# EAGLE board UNOWiFiREV2V4.0 (EAGLE 9.4.2), part 1 of 2
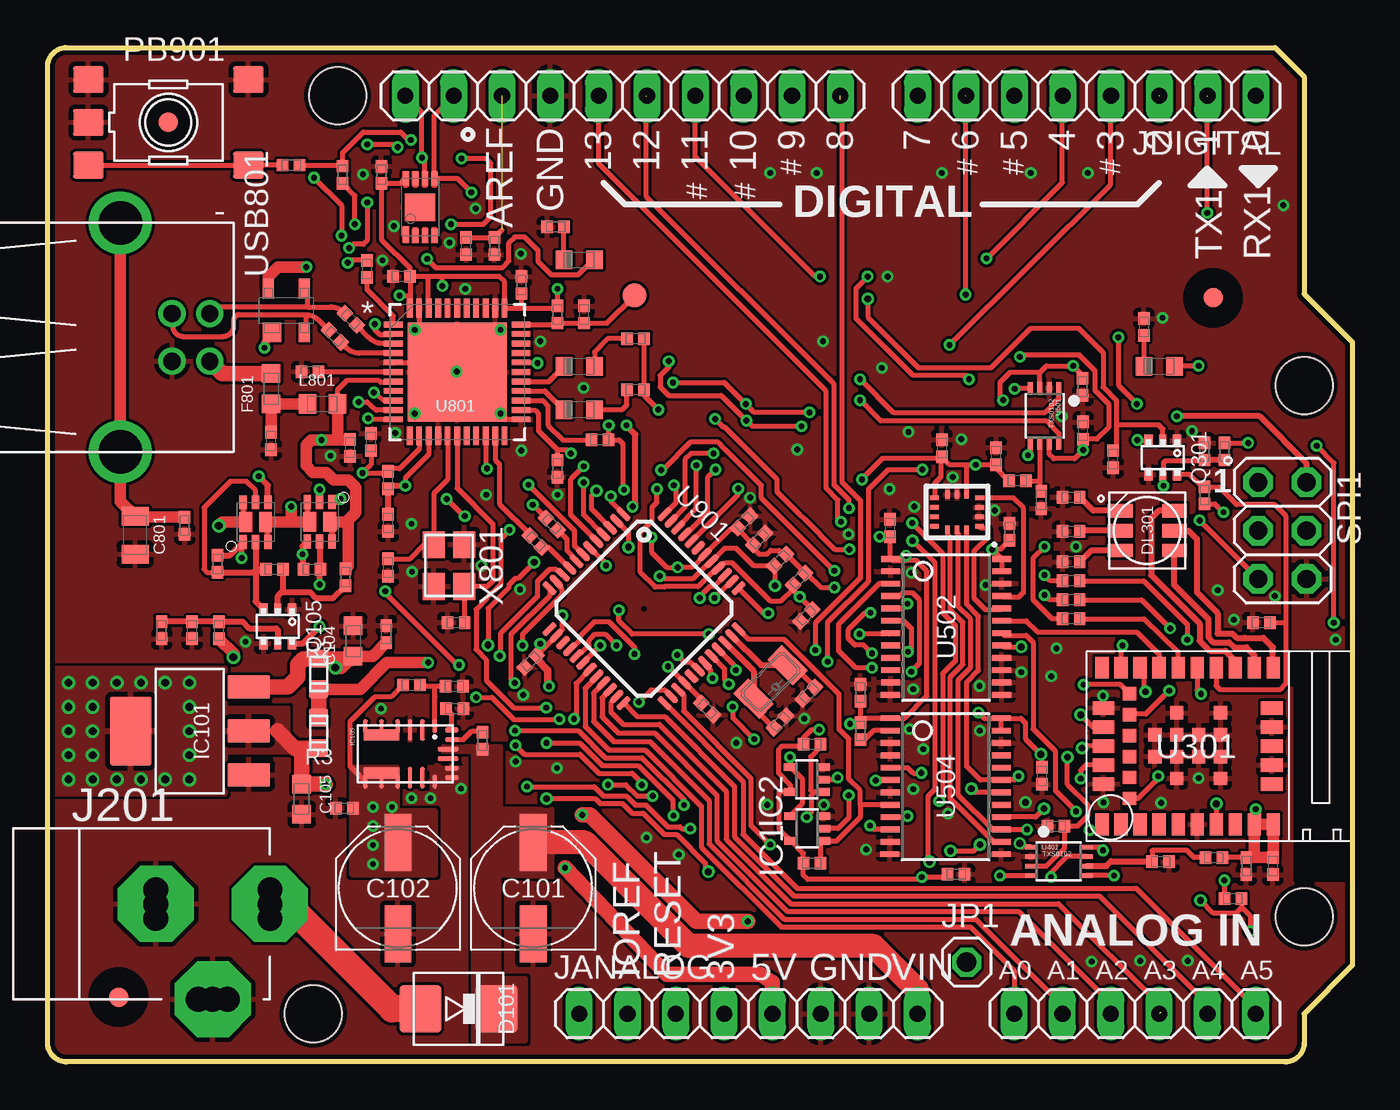
[diagram p0: board, top side]
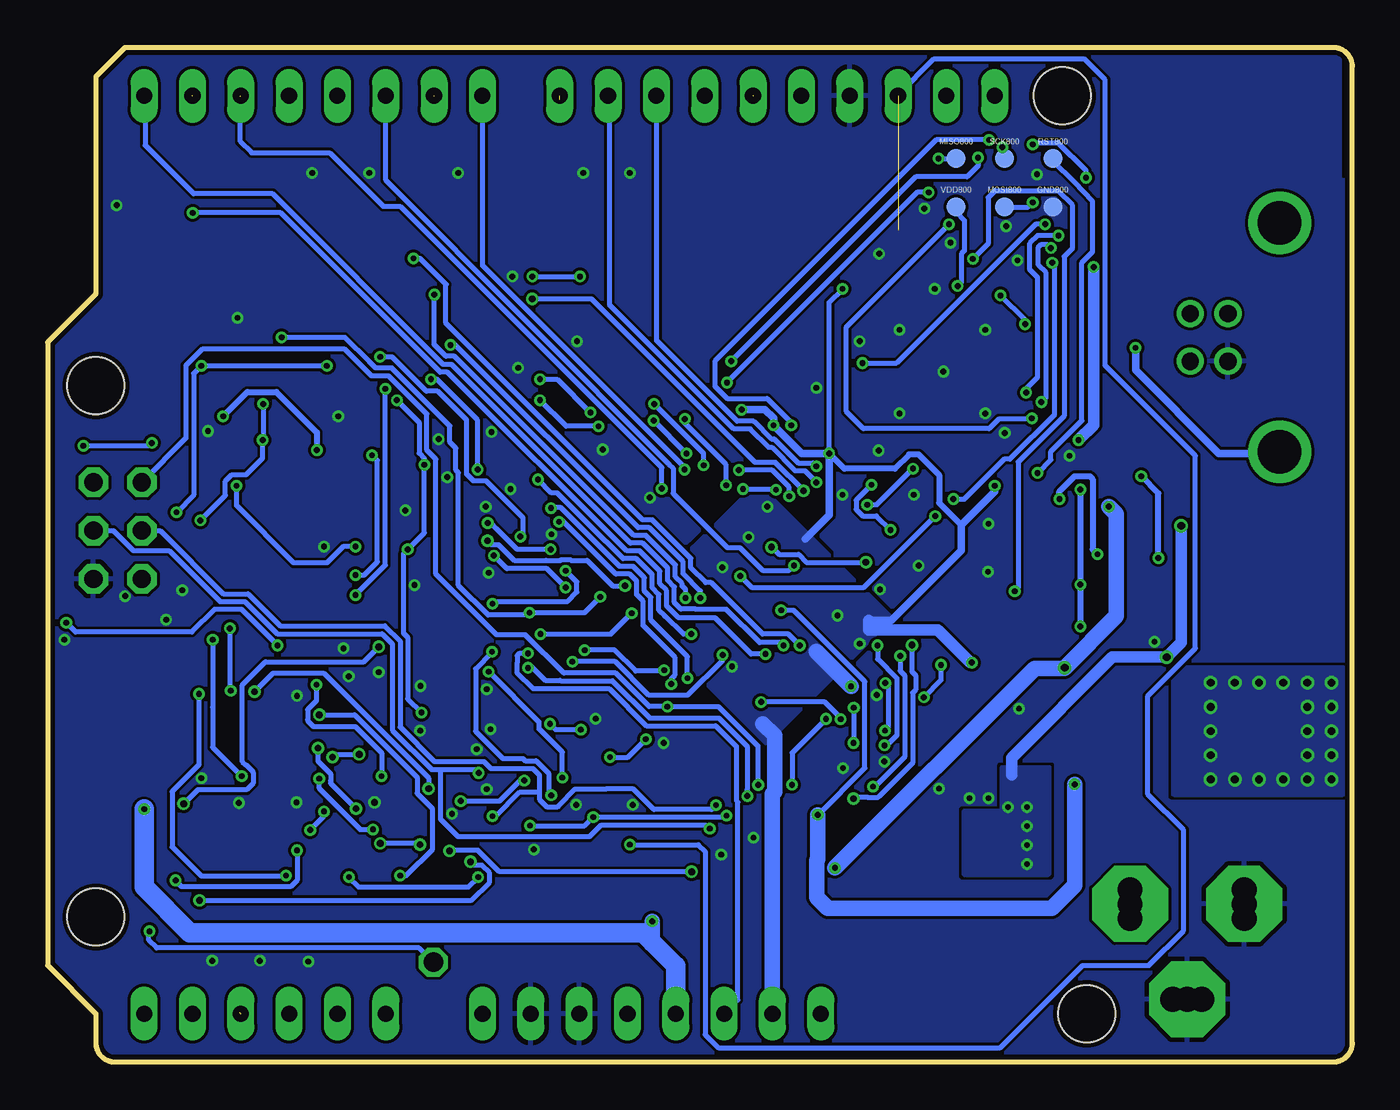
[diagram p1: board, bottom side, seen from below]

Size 68.58 x 53.34 mm. Coordinates in mm from the lower left corner, seen from the top.
Outline: 64.52,53.34 66.04,51.82 66.04,40.39 68.58,37.85 68.58,5.08 66.04,2.54 66.04,1 arc-90 65.04,0 1,0 arc-90 0,1 0,52.34 arc-90 1,53.34 64.52,53.34
Copper layers (1*16): Top 0.035mm / dielectric 1.5mm / Bottom 0.035mm
Design rules "SeeedStudio_2layers": minimum track width 6mil, minimum drill 12mil, track to track 6mil, track to pad 6mil, pad to pad 6mil, via to via 6mil, smd to smd 0mil, copper to edge 10mil, drill to drill 10mil, minimum pad ring 10mil, minimum via ring 6mil, stop-mask expansion 2mil, vias tented up to drill 100mil, thermal gap 10mil
Net classes: 0 default: width 0.006 mm, drill 0.305 mm
Holes 3 mm at 66.04,35.56 66.04,7.62 15.24,50.8 13.97,2.54
tRestrict: 3 lines

## Footprints (pad centres in the part's own frame; a part is rotated, then mirrored left to right if it is on the bottom)
0402-1005X55N = smd 0.62 x 0.62: 1 -0.45,0; 2 0.45,0
PANASONIC_D = smd 3 x 1.4: + 2.4,0; - -2.4,0
0603-1608X90N = smd 0.95 x 1: 1 -0.8,0; 2 0.8,0
0805-R2013X50N = smd 0.95 x 1.45: 1 -1,0; 2 1,0
SMB_DO214AA = smd 2.2 x 2.5: A -2,0; C 2,0
SOT190P230X110-4N = smd 1 x 1: 1 -1.15,0.75 | smd 1 x 0.6: 2 -1.15,-0.95; 3 1.15,-0.95; 4 1.15,0.95
RGBLED = smd 1.3 x 0.7: 1 -1.425,1.05; 2 -1.425,0; 3 -1.425,-1.05; 4 1.425,-1.05; 5 1.425,0; 6 1.425,1.05
FD-1-2 = smd 1.016 x 1.016: P$1 0,0
TP-1.00MM = smd 1 x 1 bottom: X 0,0
SC70-5 = smd 0.4 x 0.7: 1 -0.65,-0.85; 2 0,-0.85; 3 0.65,-0.85; 4 0.65,0.85; 5 -0.65,0.85
SOT223 = smd 2.235 x 1.219: 1 -3.099,2.311; 2 -3.099,0; 3 -3.099,-2.311 | smd 2.2 x 3.6: 4 3.099,0
MPM3610 = smd 0.7 x 0.25: 1 -1.45,1.55; 4 -1.45,-0.4; 5 -1.45,-1.25; 6 -1.45,-2.1; 7 1.45,-2.1; 8 1.45,-1.25; 9 1.45,-0.4; 12 1.45,1.55 | smd 1.1 x 0.25: 2 -1.25,0.9; 3 -1.25,0.25; 10 1.25,0.25; 11 1.25,0.9 | smd 0.25 x 0.7: 13 1.25,2.45; 14 0.75,2.45; 17 -0.75,2.45; 18 -1.25,2.45 | smd 0.25 x 1.1: 15 0.25,2.25; 16 -0.25,2.25 | smd 0.6 x 1.95: 19 -1,-1.25; 20 1,-1.25
POWERSUPPLY_DC-21MM = drill 1.3 pad 4 octagon: +1 -0.076,-6.35; -1 -0.076,-0.356; E1 -5.08,-3.353 | drill 1.3: +2 -0.838,-6.35; +3 0.686,-6.35; -2 -0.838,-0.356; -3 0.686,-0.356; E2 -5.08,-2.591; E3 -5.08,-4.115
1X14_ = drill 0.85 pad 1.422 long: 1 -17.78,0; 2 -15.24,0; 3 -12.7,0; 4 -10.16,0; 5 -7.62,0; 6 -5.08,0; 7 -2.54,0; 8 0,0; 9 5.08,0; 10 7.62,0; 11 10.16,0; 12 12.7,0; 13 15.24,0; 14 17.78,0
1X18_ = drill 0.85 pad 1.422 long: 1 -17.78,0; 2 -15.24,0; 3 -12.7,0; 4 -10.16,0; 5 -7.62,0; 6 -5.08,0; 7 -2.54,0; 8 0,0; 9 4.064,0; 10 6.604,0; 11 9.144,0; 12 11.684,0; 13 14.224,0; 14 16.764,0; 15 19.304,0; 16 21.844,0; 17 24.384,0; 18 26.924,0
1X01 = drill 1.016 octagon: 1 0,0
LEDC1608X80N-AK = smd 0.9 x 0.95: A 0.8,0; C -0.8,0
TS42 = smd 1.6 x 1.4: 1 4.2,-2.25; 2 -4.2,-2.25; 3 4.2,2.25; 4 -4.2,2.25; 5 4.2,0
PWR_SC70 = smd 0.4 x 0.69: D1 -0.65,1.04; D2 0.65,-1.04; G1 0,-1.04; G2 0,1.04; S1 -0.65,-1.04; S2 0.65,1.04 | smd 0.7 x 1: D1' -0.525,0; D2' 0.525,0
SOT363 = smd 0.5 x 0.6: 1 -0.75,-0.9; 3 0.75,-0.9; 4 0.75,0.9; 6 -0.75,0.9 | smd 0.4 x 0.6: 2 0,-0.9; 5 0,0.9
C0603 = smd 0.95 x 1: 1 -0.8,0; 2 0.8,0
2X03 = drill 0.95 pad 1.55 octagon: 1 2.54,1.27; 2 2.54,-1.27; 3 0,1.27; 4 0,-1.27; 5 -2.54,1.27; 6 -2.54,-1.27
TP-1.27MM = smd 1.27 x 1.27 bottom: X 0,0
LGA14L = smd 0.45 x 0.25: 1 -1.175,0.75; 2 -1.175,0.25; 3 -1.175,-0.25; 4 -1.175,-0.75; 8 1.175,-0.75; 9 1.175,-0.25; 10 1.175,0.25; 11 1.175,0.75 | smd 0.25 x 0.45: 5 -0.5,-0.925; 6 0,-0.925; 7 0.5,-0.925; 12 0.5,0.925; 13 0,0.925; 14 -0.5,0.925
NINA-W1X = smd 0.7 x 1.15: 1 4.95,4.125; 2 3.95,4.125; 3 2.95,4.125; 4 1.95,4.125; 5 0.95,4.125; 6 -0.05,4.125; 7 -1.05,4.125; 8 -2.05,4.125; 9 -3.05,4.125; 10 -4.05,4.125; 16 -4.05,-4.125; 17 -3.05,-4.125; 18 -2.05,-4.125; 19 -1.05,-4.125; 20 -0.05,-4.125; 21 0.95,-4.125; 22 1.95,-4.125; 23 2.95,-4.125; 24 3.95,-4.125; 25 4.95,-4.125 | smd 1.15 x 0.7: 11 -3.975,2; 12 -3.975,1; 13 -3.975,0; 14 -3.975,-1; 15 -3.975,-2; 26 4.875,-2; 27 4.875,-1; 28 4.875,0; 29 4.875,1; 30 4.875,2 | smd 0.7 x 0.7: 31 3.5,2.75; 32 3.5,1.65; 33 3.5,0.55; 34 3.5,-0.55; 35 3.5,-1.65; 36 3.5,-2.75; GND@1 -1.28,1.7; GND@2 -1.28,0.55; GND@3 -1.28,-0.6; GND@4 -1.28,-1.75; GND@5 -0.13,0.55; GND@6 -0.13,-0.6; GND@7 1.02,1.7; GND@8 1.02,0.55; GND@9 1.02,-0.6; GND@10 1.02,-1.75; GND@11 2.17,0.55; GND@12 2.17,-0.6
VFSOP-8 = smd 0.25 x 0.65: P$1 -0.75,-1.45; P$2 -0.25,-1.45; P$3 0.25,-1.45; P$4 0.75,-1.45; P$5 0.75,1.45; P$6 0.25,1.45; P$7 -0.25,1.45; P$8 -0.75,1.45
TSSOP24 = smd 0.305 x 0.991: 1 -3.575,-2.918; 2 -2.925,-2.918; 3 -2.275,-2.918; 4 -1.625,-2.918; 5 -0.975,-2.918; 6 -0.325,-2.918; 7 0.325,-2.918; 8 0.975,-2.918; 9 1.625,-2.918; 10 2.275,-2.918; 11 2.925,-2.918; 12 3.575,-2.932; 13 3.575,2.918; 14 2.925,2.918; 15 2.275,2.918; 16 1.625,2.918; 17 0.975,2.918; 18 0.325,2.918; 19 -0.325,2.918; 20 -0.975,2.918; 21 -1.625,2.918; 22 -2.275,2.918; 23 -2.925,2.918; 24 -3.575,2.918
SON50P300X200X60-9N-EP160X140 = smd 0.3 x 0.85: 1 -0.75,-1.45 | smd 0.3 x 0.7: 2 -0.25,-1.525; 3 0.25,-1.525; 4 0.75,-1.525; 5 0.75,1.525; 6 0.25,1.525; 7 -0.25,1.525; 8 -0.75,1.525 | smd 1.6 x 1.4: 9 0,0
QFN50P700X700X100-45N = smd 0.991 x 0.305: 1 -3.353,2.489; 2 -3.353,2.007; 3 -3.353,1.499; 4 -3.353,0.991; 5 -3.353,0.508; 6 -3.353,0; 7 -3.353,-0.508; 8 -3.353,-0.991; 9 -3.353,-1.499; 10 -3.353,-2.007; 11 -3.353,-2.489; 23 3.353,-2.489; 24 3.353,-2.007; 25 3.353,-1.499; 26 3.353,-0.991; 27 3.353,-0.508; 28 3.353,0; 29 3.353,0.508; 30 3.353,0.991; 31 3.353,1.499; 32 3.353,2.007; 33 3.353,2.489 | smd 0.305 x 0.991: 12 -2.489,-3.353; 13 -2.007,-3.353; 14 -1.499,-3.353; 15 -0.991,-3.353; 16 -0.508,-3.353; 17 0,-3.353; 18 0.508,-3.353; 19 0.991,-3.353; 20 1.499,-3.353; 21 2.007,-3.353; 22 2.489,-3.353; 34 2.489,3.353; 35 2.007,3.353; 36 1.499,3.353; 37 0.991,3.353; 38 0.508,3.353; 39 0,3.353; 40 -0.508,3.353; 41 -0.991,3.353; 42 -1.499,3.353; 43 -2.007,3.353; 44 -2.489,3.353 | smd 5.207 x 5.207: 45 0,0
TQFP48 = smd 0.85 x 0.32: 1 -4.275,2.75; 2 -4.275,2.25; 3 -4.275,1.75; 4 -4.275,1.25; 5 -4.275,0.75; 6 -4.275,0.25; 7 -4.275,-0.25; 8 -4.275,-0.75; 9 -4.275,-1.25; 10 -4.275,-1.75; 11 -4.275,-2.25; 12 -4.275,-2.75; 25 4.275,-2.75; 26 4.275,-2.25; 27 4.275,-1.75; 28 4.275,-1.25; 29 4.275,-0.75; 30 4.275,-0.25; 31 4.275,0.25; 32 4.275,0.75; 33 4.275,1.25; 34 4.275,1.75; 35 4.275,2.25; 36 4.275,2.75 | smd 0.32 x 0.85: 13 -2.75,-4.275; 14 -2.25,-4.275; 15 -1.75,-4.275; 16 -1.25,-4.275; 17 -0.75,-4.275; 18 -0.25,-4.275; 19 0.25,-4.275; 20 0.75,-4.275; 21 1.25,-4.275; 22 1.75,-4.275; 23 2.25,-4.275; 24 2.75,-4.275; 37 2.75,4.275; 38 2.25,4.275; 39 1.75,4.275; 40 1.25,4.275; 41 0.75,4.275; 42 0.25,4.275; 43 -0.25,4.275; 44 -0.75,4.275; 45 -1.25,4.275; 46 -1.75,4.275; 47 -2.25,4.275; 48 -2.75,4.275 | smd 0 x 0: EP 0,0
USB-B-H = drill 0.914: D+ 0,1.25; D- 1.981,1.25; GND 0,-1.25; VBUS 1.981,-1.25 | drill 2.286: SHIELD1 -2.718,6.02; SHIELD2 -2.718,-6.02
CRYSTAL-3.2-2.5 = smd 1.4 x 1.15: 1 -1.1,-0.8; 2 1.1,-0.8; 3 1.1,0.8; 4 -1.1,0.8
ABS07 = smd 1.1 x 1.9: 1 -1.25,0; 2 1.25,0

## Placement (x,y rotation side)
C1  100n  [0402-1005X55N]  22,42.9 270 top
C2  4u7  [0402-1005X55N]  23.48,42.9 270 top
C101  47u  [PANASONIC_D]  25.53,9.14 90 top
C102  47u  [PANASONIC_D]  18.41,9.14 90 top
C103  100n  [0402-1005X55N]  15.6,13.35 180 top
C104  10u  [0603-1608X90N]  16.06,22.13 90 top
C105  10u  [0603-1608X90N]  13.35,13.82 270 top
C106  100n  [0402-1005X55N]  17.8,22.5 90 top
C114  100n  [0402-1005X55N]  6,22.7 270 top
C201  100n  [0402-1005X55N]  47,32.27 90 top
C202  100n  [0402-1005X55N]  49.85,31.85 90 top
C301  100n  [0402-1005X55N]  63,10.3 270 top
C302  100n  [0402-1005X55N]  64.4,10.3 90 top
C303  100n  [0402-1005X55N]  63.8,23.1 180 top
C401  100n  [0402-1005X55N]  58.5,10.53 0 top
C402  100n  [0402-1005X55N]  53,12.4 180 top
C403  100n  [0402-1005X55N]  47.75,9.88 0 top
C503  100n  [0402-1005X55N]  42.73,19.43 90 top
C504  100n  [0402-1005X55N]  44.27,28.07 90 top
C505  100n  [0402-1005X55N]  50.55,27.88 90 top
C506  100n  [0402-1005X55N]  52.27,15.05 270 top
C601  100n  [0402-1005X55N]  52.23,29.55 270 top
C602  100n  [0402-1005X55N]  54.4,35.5 270 top
C603  100n  [0402-1005X55N]  54.42,33.2 90 top
C701  100n  [0402-1005X55N]  17.55,46.65 270 top
C801  4n7  [0805-R2013X50N]  4.6,27.7 270 top
C802  1n  [0402-1005X55N]  11.75,32.65 270 top
C803  1n  [0402-1005X55N]  15.9,32.3 270 top
C804  1u  [0402-1005X55N]  13.8,36.3 180 top
C805  100n  [0402-1005X55N]  17,32.6 90 top
C806  100n  [0402-1005X55N]  17.9,28.35 270 top
C807  100n  [0402-1005X55N]  26.8,31.2 270 top
C808  100n  [0402-1005X55N]  24.9,40.85 270 top
C809  100n  [0402-1005X55N]  18.6,41.3 0 top
C810  12pF  [0402-1005X55N]  21.48,23.1 180 top
C811  12pF  [0402-1005X55N]  17.9,26 90 top
C901  4u7  [0402-1005X55N]  36.6,28.4 45 top
C902  100n  [0402-1005X55N]  37.4,27.5 225 top
C903  100n  [0402-1005X55N]  39.88,23.48 225 top
C904  20p  [0402-1005X55N]  40.02,19.39 225 top
C905  20p  [0402-1005X55N]  38.49,17.87 45 top
C906  100n  [0402-1005X55N]  34.67,18.56 135 top
C907  100n  [0402-1005X55N]  25.39,21.07 45 top
D101  1N4007  [SMB_DO214AA]  21.59,2.79 0 top
D801  PRTR5V  [SOT190P230X110-4N]  12.55,39.51 90 top
DL301  RGB  [RGBLED]  57.8,27.94 180 top
F801  0.5A  [0603-1608X90N]  11.75,35.4 90 top
FD1  DNP  [FD-1-2]  3.73,3.41 0 top
FD2  DNP  [FD-1-2]  61.26,40.18 0 top
FD3  DNP  [FD-1-2]  6.35,49.4 0 top
FRAME1  DNP  [FRAME]  0,0 0 top
FRAME101  DNP  [FRAME]  0,0 0 top
FRAME201  DNP  [FRAME]  0,0 0 top
FRAME301  DNP  [FRAME]  0,0 0 top
FRAME401  DNP  [FRAME]  0,0 0 top
FRAME501  DNP  [FRAME]  0,0 0 top
FRAME601  DNP  [FRAME]  0,0 0 top
FRAME701  DNP  [FRAME]  0,0 0 top
FRAME801  DNP  [FRAME]  0,0 0 top
FRAME901  DNP  [FRAME]  0,0 0 top
GND800  DNP  [TP-1.00MM]  15.75,44.96 0 top
HOLDER  HOLDER-UNOWIFI  [HOLDER]  -78.72,-48.88 0 top  (outside the outline)
IC1  74LVC1G125DCKR  [SC70-5]  39.92,12.28 90 top
IC2  74LVC1G125DCKR  [SC70-5]  39.9,14.85 90 top
IC101  -  [SOT223]  7.47,17.4 180 top
IC105  MPM3610  [MPM3610]  18.8,16.2 270 top
J201  -  [POWERSUPPLY_DC-21MM]  5.33,8.38 90 top
JANALOG  -  [1X14_]  45.72,2.54 0 top
JDIGITAL  -  [1X18_]  45.73,50.8 180 top
JP1  [1X01]  48.3,5.25 0 top
L801  BLM18PG471  [0603-1608X90N]  14.45,34.6 0 top
LRX800  YELLOW  [LEDC1608X80N-AK]  27.94,34.29 0 top
LTX800  YELLOW  [LEDC1608X80N-AK]  27.94,36.58 0 top
MISO800  DNP  [TP-1.00MM]  20.83,47.5 0 top
MOSI800  DNP  [TP-1.00MM]  18.29,44.96 0 top
ON100  GREEN  [LEDC1608X80N-AK]  58.42,36.58 0 top
PB901  -  [TS42]  6.35,49.4 180 top
Q101  DMP2160  [PWR_SC70]  14.3,28.4 180 top
Q102  DMP2160  [PWR_SC70]  10.93,28.39 0 top
Q105  BSS138PS  [SOT363]  12.1,22.9 180 top
Q301  BSS138PS  [SOT363]  58.62,31.78 180 top
R1  1k  [0402-1005X55N]  26.7,43.9 180 top
R2  0R  [C0603]  14.25,20.4 270 top
R3  DNP  [C0603]  14.25,17.3 90 top
R4  0R  [0402-1005X55N]  62.3,8.6 0 top
R5  100k  [0402-1005X55N]  40.17,16.7 180 top
R11  100k  [0402-1005X55N]  40.17,10.45 180 top
R101  330R  [0402-1005X55N]  57.62,38.65 90 top
R102  100k  [0402-1005X55N]  19.12,19.82 180 top
R123  100k  [0402-1005X55N]  9,22.7 270 top
R124  100k  [0402-1005X55N]  7.6,22.7 90 top
R125  100k  [0402-1005X55N]  15.66,25.49 90 top
R126  330R  [0402-1005X55N]  11.92,25.9 0 top
R127  10k  [0402-1005X55N]  13.9,25.9 180 top
R128  10k  [0402-1005X55N]  8.92,26.19 90 top
R129  19k1  [0402-1005X55N]  21.38,19.75 180 top
R130  100k  [0402-1005X55N]  22.85,16.9 90 top
R131  53k6  [0402-1005X55N]  21.4,18.57 180 top
R301  100k  [0402-1005X55N]  60.8,29.8 270 top
R302  100k  [0402-1005X55N]  56,31.7 270 top
R303  0R  [0402-1005X55N]  53.8,24.3 180 top
R304  0R  [0402-1005X55N]  53.8,25.3 180 top
R305  330R  [0402-1005X55N]  53.8,27.9 0 top
R306  330R  [0402-1005X55N]  53.8,26.3 0 top
R307  330R  [0402-1005X55N]  53.8,29.7 0 top
R308  100k  [0402-1005X55N]  60.8,32.1 90 top
R309  DNP  [0402-1005X55N]  61.85,32.1 90 top
R310  0R  [0402-1005X55N]  53.8,23.3 0 top
R405  100k  [0402-1005X55N]  61.3,10.75 0 top
R504  100k  [0402-1005X55N]  42.73,17.4 90 top
R605  100k  [0402-1005X55N]  50.98,30.55 180 top
R801  1M  [0402-1005X55N]  7.2,28.2 90 top
R802  330R  [0402-1005X55N]  16.8,41.7 90 top
R803  100k  [0402-1005X55N]  17.9,30.6 270 top
R804  1k  [0402-1005X55N]  26.5,28.29 135 top
R805  1k  [0402-1005X55N]  25.66,27.37 135 top
R806  0R  [0402-1005X55N]  29.03,32.71 0 top
R807  1k  [0402-1005X55N]  30.9,35.35 0 top
R808  1k  [0402-1005X55N]  30.9,38.02 0 top
R809  100k  [0402-1005X55N]  26.8,39.3 90 top
R810  DNP  [0402-1005X55N]  28.2,39.3 270 top
R811  22R  [0402-1005X55N]  15.93,39.06 135 top
R812  22R  [0402-1005X55N]  15.09,38.16 135 top
R901  DNP  [0402-1005X55N]  38.5,26.4 45 top
R902  100k  [0402-1005X55N]  39.5,25.4 45 top
R903  330R  [0402-1005X55N]  15.5,46.65 270 top
R904  39R  [0402-1005X55N]  12.8,47.16 180 top
RST800  DNP  [TP-1.00MM]  15.75,47.5 0 top
SCK800  DNP  [TP-1.00MM]  18.29,47.5 0 top
SPI1  -  [2X03]  64.9,27.94 90 top
TP801  DNP  [TP-1.27MM]  30.85,40.3 0 bottom
U201  LSM6DS3TR  [LGA14L]  47.8,28.91 180 top
U301  NINA-W132  [NINA-W1X]  60.37,16.61 180 top
U401  TXS0102  [VFSOP-8]  53.15,10.55 270 top
U502  MC74LVX4245  [TSSOP24]  47.23,22.88 270 top
U504  MC74LVX4245  [TSSOP24]  47.2,14.5 270 top
U601  TXS0102  [VFSOP-8]  52.4,33.98 180 top
U701  ECC608  [SON50P300X200X60-9N-EP160X140]  19.58,44.94 0 top
U801  ATMEGA32U4RC  [QFN50P700X700X100-45N]  21.53,36.28 0 top
U901  ATMEGA4809  [TQFP48]  31.35,23.83 315 top
USB801  -  [USB-B-H]  6.54,38.1 0 top
USR  YELLOW  [LEDC1608X80N-AK]  27.94,42.16 0 top
VDD800  DNP  [TP-1.00MM]  20.83,44.96 0 top
X801  16MHz  [CRYSTAL-3.2-2.5]  21.1,26.1 270 top
Y901  32768Hz  [ABS07]  37.99,19.98 45 top

## Library data of the parts
C1 C103 C106 C114 C201 C202 C301-C303 C401-C403 C503-C506 C601-C603 C701 C805-C809 C902 C903 C906 C907 = Arduino-rcl; CODE-ARDUINO: 0132; DATASHEET: http://www.tdk.com/pdf/TDKMLCCCapRange.pdf; DISTRIBUTOR-LINK: http://www.digikey.com/product-detail/en/tdk-corporation/C1005X5R1H104K050BB/445-5942-1-ND/2443982; DISTRIBUTOR-PN: 445-5942-1-ND; MANUFACTURER: TDK; MANUFACTURER-PN: C1005X5R1H104K050BB; NOTE: -
C2 C901 = Arduino-rcl; CODE-ARDUINO: 0833; DATASHEET: http://search.murata.co.jp/Ceramy/image/img/A01X/partnumbering_e_01.pdf; DISTRIBUTOR-LINK: http://www.digikey.com/product-detail/en/murata-electronics-north-america/GRM155R60J475ME47D/490-5915-1-ND/3719860; DISTRIBUTOR-PN: 490-5915-1-ND; MANUFACTURER: Murata; MANUFACTURER-PN: GRM155R60J475ME47D; NOTE: -
C101 C102 = Arduino-rcl; CODE-ARDUINO: 0113; DATASHEET: https://industrial.panasonic.com/cdbs/www-data/pdf/RDE0000/DME0000COL90.pdf; DISTRIBUTOR-LINK: https://www.digikey.com/product-detail/en/panasonic-electronic-components/EEE-1EA470WP/PCE3908CT-ND/766284; DISTRIBUTOR-PN: PCE3908CT-ND; MANUFACTURER: Panasonic; MANUFACTURER-PN: EEE-1EA470WP; PN-ALTERNATIVE1: TS13C01E470MET000R
C104 C105 = Arduino-rcl; CODE-ARDUINO: 2213; DATASHEET: http://www.murata.com/~/media/webrenewal/support/library/catalog/products/capacitor/mlcc/c02e.pdf; DISTRIBUTOR-LINK: http://www.digikey.com/product-search/en?keywords=490-10728-1-ND; DISTRIBUTOR-PN: 490-10728-1-ND; MANUFACTURER: Murata; MANUFACTURER-PN: GRM188R61C106KAALD; NOTE: -
C801 = Arduino-rcl; CODE-ARDUINO: 0689; DATASHEET: http://www.kemet.com/Lists/ProductCatalog/Attachments/40/KEM_C1010_X7R_HV_SMD.pdf; DISTRIBUTOR-LINK: www.kemet.com/docfinder?Partnumber=C0805C472KDRACTU; DISTRIBUTOR-PN: 399-6738-1-ND; MANUFACTURER: Kemet; MANUFACTURER-PN: C0805C472KDRACTU; NOTE: -
C802 C803 = Arduino-rcl; CODE-ARDUINO: 2321; DATASHEET: http://www.samsungsem.com/kr/support/product-search/mlcc/__icsFiles/afieldfile/2016/08/18/S_CL05B102KB5NNNC.pdf; DISTRIBUTOR-LINK: http://www.digikey.com/product-detail/en/samsung-electro-mechanics-america-inc/CL05B102KB5NNNC/1276-1032-1-ND/3889118; DISTRIBUTOR-PN: 1276-1032-1-ND; MANUFACTURER: Samsung; MANUFACTURER-PN: CL05B102KB5NNNC; NOTE: -
C804 = Arduino-rcl; CODE-ARDUINO: 0133; DATASHEET: http://search.murata.co.jp/Ceramy/image/img/A01X/partnumbering_e_01.pdf; DISTRIBUTOR-LINK: http://www.digikey.com/product-detail/en/murata-electronics-north-america/GRM155R61E105KA12D/490-10017-1-ND/5026367; DISTRIBUTOR-PN: 490-10017-1-ND; MANUFACTURER: Murata; MANUFACTURER-PN: GRM155R61E105KA12D; NOTE: -
C810 C811 = Arduino-rcl; CODE-ARDUINO: A5006; DATASHEET: http://search.murata.co.jp/Ceramy/image/img/A01X/partnumbering_e_01.pdf; DISTRIBUTOR-LINK: https://www.digikey.com/product-detail/en/murata-electronics-north-america/GJM1555C1H120GB01D/490-8078-1-ND/4380364; DISTRIBUTOR-PN: 490-8078-1-ND; MANUFACTURER: Murata; MANUFACTURER-PN: GJM1555C1H120GB01D; NOTE: -
C904 C905 = Arduino-rcl; CODE-ARDUINO: 2188; DATASHEET: http://www.kemet.com/docfinder?Partnumber=CBR04C200J5GAC; DISTRIBUTOR-LINK: http://www.digikey.com/product-detail/en/kemet/CBR04C200J5GAC/399-6173-1-ND/2732143; DISTRIBUTOR-PN: 399-6173-1-ND; MANUFACTURER: Kemet; MANUFACTURER-PN: CBR04C200J5GAC; NOTE: -
D101 = Arduino-diodes; CODE-ARDUINO: 0020; DATASHEET: www.comchiptech.com/cms/UserFiles/CGRA4001-G%20Thru.%20CGRA4007-HF%20RevD.pdf; DISTRIBUTOR-LINK: https://www.digikey.com/product-detail/en/comchip-technology/CGRA4007-G/641-1018-1-ND/1121140; DISTRIBUTOR-PN: 641-1018-1-ND; MANUFACTURER: Comchip; MANUFACTURER-PN: CGRA4007-G; PN-ALTERNATIVE1: 1N4007SMA
D801 = Arduino-diodes; CODE-ARDUINO: 2209; DATASHEET: http://www.nxp.com/documents/data_sheet/PRTR5V0U2X.pdf; DISTRIBUTOR-LINK: http://www.digikey.com/product-detail/en/nxp-semiconductors/PRTR5V0U2X,215/568-4140-1-ND/1589981; DISTRIBUTOR-PN: 568-4140-1-ND; MANUFACTURER: NXP; MANUFACTURER-PN: PRTR5V0U2X,215
DL301 = Arduino-diodes; CODE-ARDUINO: 2211; DATASHEET: http://www.osram-os.com/Graphics/XPic9/00134830_0.pdf; DISTRIBUTOR-LINK: https://www.digikey.com/product-detail/en/osram-opto-semiconductors-inc/LTRBGFSF-ABCB-QKYO-Z/475-2899-1-ND/2415091; DISTRIBUTOR-PN: 475-2899-1-ND; MANUFACTURER: OSRAM Opto Semiconductors Inc.; MANUFACTURER-PN: LTRBGFSF-ABCB-QKYO-Z
F801 = Arduino-rcl; CODE-ARDUINO: 2217; DATASHEET: http://www.bourns.com/docs/Product-Datasheets/mffsmf.pdf; DISTRIBUTOR-LINK: http://www.digikey.com/product-detail/en/bourns-inc/MF-FSMF050X-2/MF-FSMF050X-2CT-ND/2039389; DISTRIBUTOR-PN: MF-FSMF050X-2CT-ND; MANUFACTURER: Bourns Inc; MANUFACTURER-PN: F-FSMF050X-2; NOTE: IHOLD = 0.5A
FD1-FD3 GND800 MISO800 MOSI800 RST800 SCK800 TP801 VDD800 = Arduino-utility; CODE-ARDUINO: DNP; DATASHEET: DNP; DISTRIBUTOR-LINK: DNP; DISTRIBUTOR-PN: DNP; MANUFACTURER: DNP; MANUFACTURER-PN: DNP
FRAME1 FRAME101 FRAME201 FRAME301 FRAME401 FRAME501 FRAME601 FRAME701 FRAME801 FRAME901 = Arduino-utility; CODE-ARDUINO: DNP; DATASHEET: DNP; DISTRIBUTOR-LINK: DNP; DISTRIBUTOR-PN: DNP; MANUFACTURER: DNP; MANUFACTURER-PN: DNP; NOTE: DNP
HOLDER = Arduino-utility; CODE-ARDUINO: 2426; DESCRIPTION: DNP; DISTRIBUTOR-LINK: DNP; DISTRIBUTOR-PN: DNP; MANUFACTURER: DNP; MANUFACTURER-PN: DNP
IC1 IC2 = Arduino-ICs; CODE-ARDUINO: 0040; DATASHEET: http://www.ti.com/lit/ds/symlink/sn74lvc1g125.pdf; DISTRIBUTOR-LINK: https://www.digikey.com/product-detail/en/texas-instruments/SN74LVC1G125DCKR/296-11604-1-ND/385743; DISTRIBUTOR-PN: 296-11604-1-ND; MANUFACTURER: Texas Instruments; MANUFACTURER-PN: SN74LVC1G125DCKR; NOTE: NO
IC101 = Arduino-ICs; CODE-ARDUINO: 0045; DATASHEET: https://media.digikey.com/pdf/Data%20Sheets/NXP%20PDFs/NX1117C(E).pdf; DISTRIBUTOR-LINK: https://www.digikey.com/product-detail/en/nxp-usa-inc/NX1117CE33Z,115/568-8443-1-ND/2765160; DISTRIBUTOR-PN: 568-8443-1-ND; MANUFACTURER: NXP; MANUFACTURER-PN: NX1117CE33Z,115; NOTE: NO
IC105 = Arduino-ICs; CODE-ARDUINO: 2093; DATASHEET: https://www.monolithicpower.com/pub/media/document/MPM3610_r1.01.pdf; DISTRIBUTOR-LINK: https://www.digikey.com/product-detail/en/monolithic-power-systems-inc/MPM3610AGQV-P/1589-1249-1-ND/5298336; DISTRIBUTOR-PN: 1589-1249-1-ND; MANUFACTURER: MPS; MANUFACTURER-PN: MPM3610AGQV-P; RESTRICTIONS: NO
J201 = Arduino-connectors; CODE-ARDUINO: 0018; DATASHEET: http://www.mouser.com/ds/2/253/KC-301287-195995.pdf; DISTRIBUTOR-LINK: https://www.mouser.it/ProductDetail/Kobiconn/163-179PH-EX/?qs=Xb8IjHhkxj5l2UOaIqcGCw==; DISTRIBUTOR-PN: 163-179PH-EX; MANUFACTURER: Kobiconn; MANUFACTURER-PN: 163-179PH-EX
JANALOG = Arduino-connectors; CODE-ARDUINO: 3649; DATASHEET: -; DISTRIBUTOR-LINK: -; DISTRIBUTOR-PN: -; MANUFACTURER: -; MANUFACTURER-PN: -; NOTE: -
JDIGITAL = Arduino-connectors; CODE-ARDUINO: 3648; DATASHEET: -; DISTRIBUTOR-LINK: -; DISTRIBUTOR-PN: -; MANUFACTURER: -; MANUFACTURER-PN: -; NOTE: -
JP1 = pinhead
L801 = Arduino-rcl; CODE-ARDUINO: 2200; DATASHEET: http://search.murata.co.jp/Ceramy/image/img/PDF/ENG/L0110S0100BLM18P.pdf; DISTRIBUTOR-LINK: http://www.digikey.com/product-detail/en/murata-electronics-north-america/BLM18PG471SN1D/490-5223-1-ND/1948399; DISTRIBUTOR-PN: 490-5223-1-ND; MANUFACTURER: Murata; MANUFACTURER-PN: BLM18PG471SN1D; NOTE: -
LRX800 LTX800 USR = Arduino-diodes; CODE-ARDUINO: 2243; DATASHEET: http://media.digikey.com/pdf/Data%20Sheets/Avago%20PDFs/HSMz-Czzz.pdf; DISTRIBUTOR-LINK: http://www.digikey.com/product-detail/en/broadcom-limited/HSMY-C190/516-1424-1-ND/637748; DISTRIBUTOR-PN: 516-1424-1-ND; MANUFACTURER: Avago; MANUFACTURER-PN: HSMY-C190
ON100 = Arduino-diodes; CODE-ARDUINO: 2204; DATASHEET: http://media.digikey.com/pdf/Data%20Sheets/Avago%20PDFs/HSMz-Czzz.pdf; DISTRIBUTOR-LINK: http://www.digikey.com/product-detail/en/broadcom-limited/HSMG-C190/516-1425-1-ND/637749; DISTRIBUTOR-PN: 516-1425-1-ND; MANUFACTURER: Avago; MANUFACTURER-PN: HSMG-C190
PB901 = Arduino-pushbuttons; CODE-ARDUINO: 0946; DATASHEET: http://www.mouser.com/ds/2/418/NG_CD_1571636_C1-122399.pdf; DISTRIBUTOR-LINK: https://www.mouser.it/ProductDetail/TE-Connectivity/1571636-3/?qs=%2fha2pyFaduiys%2fNUBzym%252bcoSb9tuK3Sjuv54qjf0hQ0%3d; DISTRIBUTOR-PN: 506-1571636-3; MANUFACTURER: TE; MANUFACTURER-PN: 1571636-3; PN-ALTERNATIVE1: TS42031-160WWS027260
Q101 Q102 = Arduino-transistors; CODE-ARDUINO: 2324; DATASHEET: http://www.diodes.com/_files/datasheets/ds31643.pdf; DISTRIBUTOR-LINK: http://www.digikey.com/product-detail/en/diodes-incorporated/DMP2160UFDB-7/DMP2160UFDB-7DI-ND/4249940; DISTRIBUTOR-PN: DMP2160UFDB-7DI-ND; MANUFACTURER: Diodes Inc; MANUFACTURER-PN: DMP2160UFDB-7
Q105 Q301 = Arduino-transistors; CODE-ARDUINO: 2323; DATASHEET: https://assets.nexperia.com/documents/data-sheet/BSS138PS.pdf; DISTRIBUTOR-LINK: http://www.digikey.com/product-detail/en/nxp-semiconductors/BSS138PS,115/568-8393-1-ND/2763927; DISTRIBUTOR-PN: 568-8393-1-ND; MANUFACTURER: NXP; MANUFACTURER-PN: BSS138PS,115
R1 R804 R805 R807 R808 = Arduino-rcl; CODE-ARDUINO: 0140; DATASHEET: www.yageo.com.tw/exep/pages/download/literatures/PYu-R_INT-thick_7.pdf; DISTRIBUTOR-LINK: http://www.digikey.com/product-detail/en/yageo/RC0402FR-071KL/311-1.00KLRCT-ND/729460; DISTRIBUTOR-PN: 311-1.00KLRCT-ND; MANUFACTURER: Yageo; MANUFACTURER-PN: RC0402FR-071KL; NOTE: NO
R2 = Arduino-rcl; CODE-ARDUINO: 0233; DATASHEET: http://www.yageo.com/exep/pages/download/literatures/PYu-R_Marking_2.pdf; DISTRIBUTOR-LINK: https://www.digikey.com/product-detail/en/yageo/RC0603JR-070RL/311-0.0GRCT-ND/729622; DISTRIBUTOR-PN: 311-0.0GRCT-ND; MANUFACTURER: Yageo; MANUFACTURER-PN: RC0603JR-070RL; NOTE: NO
R3 = Arduino-rcl; CODE-ARDUINO: DNP; DATASHEET: DNP; DISTRIBUTOR-LINK: DNP; DISTRIBUTOR-PN: DNP; MANUFACTURER: DNP; MANUFACTURER-PN: DNP; NOTE: DNP
R4 R303 R304 R310 R806 = Arduino-rcl; CODE-ARDUINO: 0039; DATASHEET: www.yageo.com.tw/exep/pages/download/literatures/PYu-R_INT-thick_7.pdf; DISTRIBUTOR-LINK: http://www.digikey.com/product-detail/en/yageo/RC0402FR-070RL/311-0.0LRCT-ND/2827888; DISTRIBUTOR-PN: 311-0.0LRCT-ND; MANUFACTURER: Yageo; MANUFACTURER-PN: RC0402FR-070RL; NOTE: NO
R5 R11 R102 R123-R125 R130 R301 R302 R308 R405 R504 R605 R803 R809 R902 = Arduino-rcl; CODE-ARDUINO: 0134; DATASHEET: www.yageo.com.tw/exep/pages/download/literatures/PYu-R_INT-thick_7.pdf; DISTRIBUTOR-LINK: http://www.digikey.com/product-detail/en/yageo/RC0402FR-07100KL/311-100KLRCT-ND/729473; DISTRIBUTOR-PN: 311-100KLRCT-ND; MANUFACTURER: Yageo; MANUFACTURER-PN: RC0402FR-07100KL; NOTE: NO
R101 R126 R305-R307 R802 R903 = Arduino-rcl; CODE-ARDUINO: 2229; DATASHEET: www.yageo.com.tw/exep/pages/download/literatures/PYu-R_INT-thick_7.pdf; DISTRIBUTOR-LINK: http://www.digikey.com/product-detail/en/yageo/RC0402FR-07330RL/311-330LRCT-ND/729541; DISTRIBUTOR-PN: 311-330LRCT-ND; MANUFACTURER: Yageo; MANUFACTURER-PN: RC0402FR-07330RL; NOTE: NO
R127 R128 = Arduino-rcl; CODE-ARDUINO: 0136; DATASHEET: www.yageo.com.tw/exep/pages/download/literatures/PYu-R_INT-thick_7.pdf; DISTRIBUTOR-LINK: http://www.digikey.com/product-detail/en/yageo/RC0402FR-0710KL/311-10.0KLRCT-ND/729470; DISTRIBUTOR-PN: 311-10.0KLRCT-ND; MANUFACTURER: Yageo; MANUFACTURER-PN: RC0402FR-0710KL; NOTE: NO
R129 = Arduino-rcl; CODE-ARDUINO: A5369; DATASHEET: http://www.yageo.com/documents/recent/PYu-RC_Group_51_RoHS_L_10.pdf; DISTRIBUTOR-LINK: https://www.digikey.it/product-detail/it/yageo/RC0402FR-0719K1L/311-19.1KLRTR-ND/726552; DISTRIBUTOR-PN: 311-19.1KLRTR-ND; MANUFACTURER: Yageo; MANUFACTURER-PN: RC0402FR-0719K1L; NOTE: NO
R131 = Arduino-rcl; CODE-ARDUINO: A5313; DATASHEET: www.yageo.com.tw/exep/pages/download/literatures/PYu-R_INT-thick_7.pdf; DISTRIBUTOR-LINK: https://www.digikey.com/product-detail/en/yageo/RC0402FR-0753K6L/311-53.6KLRCT-ND/729581; DISTRIBUTOR-PN: 311-53.6KLRCT-ND; MANUFACTURER: Yageo; MANUFACTURER-PN: RC0402FR-0753K6L; NOTE: 1% ONLY
R309 R810 R901 = Arduino-rcl; CODE-ARDUINO: DNP; DATASHEET: DNP; DISTRIBUTOR-LINK: DNP; DISTRIBUTOR-PN: DNP; MANUFACTURER: DNP; MANUFACTURER-PN: DNP; NOTE: NO
R801 = Arduino-rcl; CODE-ARDUINO: 0139; DATASHEET: www.yageo.com.tw/exep/pages/download/literatures/PYu-R_INT-thick_7.pdf; DISTRIBUTOR-LINK: http://www.digikey.com/product-detail/en/yageo/RC0402JR-07330RL/311-330JRCT-ND/729412; DISTRIBUTOR-PN: 311-330JRCT-ND; MANUFACTURER: Yageo; MANUFACTURER-PN: RC0402JR-07330RL; NOTE: NO
R811 R812 = Arduino-rcl; CODE-ARDUINO: 0468; DATASHEET: www.yageo.com.tw/exep/pages/download/literatures/PYu-R_INT-thick_7.pdf; DISTRIBUTOR-LINK: http://www.digikey.com/products/en?keywords=311-22.0LRCT-ND; DISTRIBUTOR-PN: 311-22.0LRCT-ND; MANUFACTURER: Yageo; MANUFACTURER-PN: RC0402FR-0722RL; NOTE: NO
R904 = Arduino-rcl; CODE-ARDUINO: 0138; DATASHEET: www.yageo.com.tw/exep/pages/download/literatures/PYu-R_INT-thick_7.pdf; DISTRIBUTOR-LINK: http://www.digikey.com/product-detail/en/yageo/RC0402FR-0739RL/311-39.0LRCT-ND/729549; DISTRIBUTOR-PN: 311-39.0LRCT-ND; MANUFACTURER: Yageo; MANUFACTURER-PN: RC0402FR-0739RL; NOTE: NO
SPI1 = Arduino-connectors; CODE-ARDUINO: 0114; DATASHEET: -; DISTRIBUTOR-LINK: https://www.digikey.com/product-detail/en/samtec-inc/TSW-103-25-S-D/TSW-103-25-S-D-ND/7863771; DISTRIBUTOR-PN: TSW-103-25-S-D-ND; MANUFACTURER: Samtec; MANUFACTURER-PN: TSW-103-25-S-D
U201 = Arduino-Sensors; CODE-ARDUINO: 2326; DATASHEET: https://www.st.com/content/ccc/resource/technical/document/datasheet/a3/f5/4f/ae/8e/44/41/d7/DM00133076.pdf/files/DM00133076.pdf/jcr:content/translations/en.DM00133076.pdf; DISTRIBUTOR-LINK: https://www.digikey.com/product-detail/en/stmicroelectronics/LSM6DS3TR/497-15383-1-ND/5180534; DISTRIBUTOR-PN: 497-15383-1-ND; MANUFACTURER: ST; MANUFACTURER-PN: LSM6DS3TR
U301 = Arduino-ucs&SoCs; CODE-ARDUINO: NINA-W132; DATASHEET: https://www.u-blox.com/sites/default/files/NINA-W1_DataSheet_%28UBX-17006694%29.pdf; DISTRIBUTOR-LINK: https://www.digikey.com/product-detail/en/u-blox-america-inc/NINA-W132/672-1072-1-ND/7931822; DISTRIBUTOR-PN: 672-1072-1-ND; MANUFACTURER: Ublocks; MANUFACTURER-PN: NINA-W132
U401 U601 = Arduino-ICs; CODE-ARDUINO: A5332; DATASHEET: http://www.ti.com/lit/ds/symlink/txs0102.pdf; DISTRIBUTOR-LINK: http://www.digikey.com/product-detail/en/texas-instruments/TXS0102DCURG4/296-41875-1-ND/5224578; DISTRIBUTOR-PN: 296-41875-1-ND; MANUFACTURER: Texas Instruments; MANUFACTURER-PN: TXS0102DCURG4; NOTE: NO
U502 U504 = Arduino-ICs; CODE-ARDUINO: A5327; DATASHEET: http://www.onsemi.com/pub/Collateral/MC74LVX4245-D.PDF; DISTRIBUTOR-LINK: https://www.digikey.com/product-detail/en/on-semiconductor/MC74LVX4245DTR2G/MC74LVX4245DTR2GOSCT-ND/2120954; DISTRIBUTOR-PN: MC74LVX4245DTR2GOSCT-ND; MANUFACTURER: ON Semiconductor; MANUFACTURER-PN: MC74LVX4245DTR2G; NOTE: NO
U701 = Arduino-ICs; CODE-ARDUINO: ATECC608A-MAHDA-T; DATASHEET: http://ww1.microchip.com/downloads/en/DeviceDoc/40001977A.pdf; DISTRIBUTOR-LINK: https://www.digikey.com/product-detail/en/microchip-technology/ATECC608A-MAHDA-T/ATECC608A-MAHDA-TCT-ND/7928236; DISTRIBUTOR-PN: ATECC608A-MAHDA-TCT-ND; MANUFACTURER: Microchip; MANUFACTURER-PN: ATECC608A-MAHDA-T; NOTE: NO
U801 = Arduino-ucs&SoCs; CODE-ARDUINO: ATMEGA32u4; DATASHEET: http://ww1.microchip.com/downloads/en/DeviceDoc/Atmel-7766-8-bit-AVR-ATmega16U4-32U4_Datasheet.pdf; DISTRIBUTOR-LINK: https://www.digikey.com/product-detail/en/microchip-technology/ATMEGA32U4RC-MU/ATMEGA32U4RC-MU-ND/2507984; DISTRIBUTOR-PN: ATMEGA32U4RC-MU-ND; MANUFACTURER: Microchip; MANUFACTURER-PN: ATMEGA32U4RC-MU
U901 = Arduino-ucs&SoCs; CODE-ARDUINO: ATMEGA4809; DATASHEET: http://ww1.microchip.com/downloads/en/DeviceDoc/40002016A.pdf; DISTRIBUTOR-LINK: https://www.digikey.com/product-detail/en/microchip-technology/ATMEGA4809-AFR/ATMEGA4809-AFRCT-ND/8540756; DISTRIBUTOR-PN: ATMEGA4809-AFRCT-ND; MANUFACTURER: Microchip; MANUFACTURER-PN: ATMEGA4809-AFR
USB801 = Arduino-connectors; CODE-ARDUINO: 0056; DATASHEET: http://cnctech.us/pdfs/1001-003-02000.pdf; DISTRIBUTOR-LINK: https://www.digikey.com/products/it?keywords=1001-003-02000; DISTRIBUTOR-PN: 1175-1002-ND; MANUFACTURER: CNC Tech; MANUFACTURER-PN: 1001-003-02000; PN-ALTERNATIVE1: USB-B-S-RA-WT-SPCC
X801 = Arduino-crystals; CODE-ARDUINO: 0395; DATASHEET: https://www.ecsxtal.com/store/pdf/ECX-33Q.pdf; DISTRIBUTOR-LINK: https://www.digikey.com/product-detail/en/ecs-inc/ECS-160-12-33Q-JES-TR/XC2147CT-ND/6050976; DISTRIBUTOR-PN: XC2147CT-ND; MANUFACTURER: ECS; MANUFACTURER-PN: ECS-160-12-33Q-JES-TR
Y901 = Arduino-crystals; CODE-ARDUINO: 0213; DATASHEET: http://www.abracon.com/Resonators/ABS07.pdf; DISTRIBUTOR-LINK: http://www.digikey.com/product-detail/en/abracon-llc/ABS07-32.768KHZ-T/535-9542-1-ND/1237009; DISTRIBUTOR-PN: 535-9542-1-ND; MANUFACTURER: Abracon LLC; MANUFACTURER-PN: ABS07-32.768KHZ-T

## Nets
2XTRANSLATOR1:N$1: C601.1 R605.1 U601.P$6
2XTRANSLATOR2:N$1: C401.1 R405.1 U401.P$6
16XTRANSLATOR1:N$1: R504.1 U504.2
+3V3: C105.1 C201.1 C202.1 C301.1 C302.2 C402.1 C505.1 C506.1 C602.1 IC101.2 IC101.4 JANALOG.4 ON100.A R3.1 R301.2 R405.2 R605.2 U201.5 U201.8 U301.9 U301.10 U401.P$3 U502.23 U502.24 U504.23 U504.24 U601.P$3
+5V: C104.1 C106.1 IC101.3 JANALOG.5 Q101.D2 Q101.D2' Q102.D2 Q102.D2' R2.1
GND: C1.2 C2.2 C101.- C102.- C103.2 C104.2 C105.2 C106.2 C114.2 C201.2 C202.2 C301.2 C302.1 C303.2 C401.2 C402.2 C403.2 C503.2 C504.2 C505.2 C506.2 C601.2 C602.2 C603.2 C701.1 C801.2 C802.2 C803.2 C804.2 C805.2 C806.2 C807.2 C808.1 C809.1 C810.2 C811.1 C901.2 C902.1 C903.2 C904.2 C905.2 C906.1 C907.1 GND800.X IC1.3 IC2.3 IC101.1 IC105.3 IC105.12 IC105.13 IC105.14 J201.-1 J201.-2 J201.-3 J201.E1 J201.E2 J201.E3 JANALOG.6 JANALOG.7 JDIGITAL.15 PB901.1 PB901.2 PB901.5 Q105.1 Q105.4 Q301.1 Q301.4 R1.2 R101.2 R124.1 R129.1 R131.1 R302.2 R305.1 R306.1 R307.1 R308.2 R801.1 R810.1 SPI1.6 U201.2 U201.3 U201.6 U201.7 U301.6 U301.12 U301.14 U301.26 U301.30 U301.GND@1 U301.GND@2 U301.GND@3 U301.GND@4 U301.GND@5 U301.GND@6 U301.GND@7 U301.GND@8 U301.GND@9 U301.GND@10 U301.GND@11 U301.GND@12 U401.P$2 U502.2 U502.11 U502.12 U502.13 U502.14 U502.15 U502.16 U502.22 U504.3 U504.4 U504.7 U504.11 U504.12 U504.13 U504.22 U601.P$2 U701.4 U701.9 U801.5 U801.15 U801.23 U801.35 U801.43 U801.45 U901.15 U901.29 U901.43 USB801.GND X801.2 X801.4
MEDBG1:N$1: C801.1 D801.1 R801.2 USB801.SHIELD1 USB801.SHIELD2
MEDBG1:N$2: F801.2 USB801.VBUS
MEDBG1:N$3: C802.1 F801.1 L801.1
MEDBG1:N$4: R802.1 U801.1
MEDBG1:N$5: C804.1 U801.6
MEDBG1:N$6: C805.1 R803.1 RST800.X U801.13
MEDBG1:N$7: C811.2 U801.16 X801.1
MEDBG1:N$8: C810.1 U801.17 X801.3
MEDBG1:N$9: R804.2 U801.20
MEDBG1:N$10: R805.2 U801.21
MEDBG1:N$11: LTX800.C U801.27
MEDBG1:N$12: R806.1 U801.25
MEDBG1:N$13: LRX800.C U801.26
MEDBG1:N$14: LTX800.A R808.1
MEDBG1:N$15: LRX800.A R807.1
MEDBG1:N$16: R809.1 R810.2 TP801.X U801.33
MEDBG1:N$17: MISO800.X U801.11
MEDBG1:N$18: MOSI800.X U801.10
MEDBG1:N$19: SCK800.X U801.9
MEDBG1:USB2_N: R811.1 U801.3
MEDBG1:USB2_PI: R812.1 U801.4
MEDBG1:USB_N: D801.3 R811.2 USB801.D-
MEDBG1:USB_P: D801.2 R812.2 USB801.D+
N$1: U301.20 U401.P$5
N$2: U301.1 U502.18
N$3: U301.22 U502.19
N$4: U201.14 U301.36 U504.19
N$5: U301.23 U504.18
N$6: U201.1 U502.20
N$7: U301.27 U401.P$4
N$8: U301.28 U504.16
N$9: IC1.2 U502.6
N$10: IC2.2 U502.4
N$12: R304.2 U601.P$5
N$13: R303.2 U601.P$4
N$14: JP1.1 R4.2 R802.2 R901.1 U901.41
N$15: U201.4 U502.21
N$16: U201.12 U504.14
N$17: R903.2 U801.29
N$18: U301.7 U502.17
N$19: R805.1 U901.9
N$20: R804.1 U901.8
N$21: U901.26 USR.A
N$22: R1.1 USR.C
N$23: U201.13 U301.29 U504.15
PA0: JDIGITAL.3 U901.44
PA1: JDIGITAL.8 U901.45
PA2: JDIGITAL.17 U601.P$1 U701.5 U901.46
PA3: JDIGITAL.18 U601.P$8 U701.6 U901.47
PA4: U504.6 U901.48
PA5: U502.5 U901.1
PA6: U401.P$1 U901.2
PA7: Q301.2 R302.1 U901.3
PB0: JDIGITAL.10 U901.4
PB1: JDIGITAL.11 U901.5
PB2: JDIGITAL.6 U901.6
PB3: IC2.1 R5.1 U504.10 U901.7
PC0: SPI1.4 U504.5 U901.10
PC1: IC1.4 IC2.4 SPI1.1 U901.11
PC2: SPI1.3 U504.9 U901.12
PC3: U901.13
PC4: JDIGITAL.2 U901.16
PC5: JDIGITAL.1 U901.17
PC6: JDIGITAL.5 U901.18
PC7: U502.3 U901.19
PD0: JANALOG.9 U901.20
PD1: JANALOG.10 U901.21
PD2: JANALOG.11 U901.22
PD3: JANALOG.12 U901.23
PD4: JANALOG.13 U901.24
PD5: JANALOG.14 U901.25
PD7: C1.1 C2.1 JDIGITAL.16 U901.27
PE0: JDIGITAL.12 U901.30
PE1: JDIGITAL.13 U901.31
PE2: JDIGITAL.14 U901.32
PE3: JDIGITAL.9 U901.33
PF2: IC1.1 R11.1 U504.8 U901.36
PF3: U502.7 U901.37
PF4: JDIGITAL.7 U901.38
PF5: JDIGITAL.4 U901.39
PWR1:N17690335: Q101.S1 Q101.S2 R127.2
PWR1:N17690346: Q101.G1 Q101.G2 Q105.6 R127.1
PWR1:N17690381: Q105.2 R125.1 R126.2
PWR1:N17690821: Q102.S1 Q102.S2 R128.2
PWR1:N17690840: Q102.G1 Q102.G2 Q105.3 R126.1 R128.1
PWR1:N17690878: C114.1 Q105.5 R123.1 R124.2
PWR1:N$1: D101.A J201.+1 J201.+2 J201.+3
PWR1:N$3: C102.+ C103.1 IC105.7 IC105.8 IC105.9 IC105.20 Q102.D1 Q102.D1' R102.2 R123.2
PWR1:N$4: ON100.C R101.1
PWR1:N$35: IC105.1 R102.1 R129.2
PWR1:N$36: IC105.17 R130.2
PWR1:N$37: IC105.18 R131.2
TRG_RST: C903.1 JANALOG.3 Q301.3 R806.2 R902.1 R903.1 R904.1 SPI1.5 U901.40
UC1:N$2: PB901.3 PB901.4 R904.2
UC1:N$3: C905.1 U901.34 Y901.1
UC1:N$4: C904.1 U901.35 Y901.2
UPDI_REMOTE: R4.1 U401.P$8
VDD: C403.1 C503.1 C504.1 C603.1 C701.2 C806.1 C807.1 C808.2 C809.2 C901.1 C902.2 C906.2 C907.2 IC1.5 IC2.5 JANALOG.2 R2.2 R3.2 R5.2 R11.2 R504.2 R803.2 R807.2 R808.2 R809.2 R901.2 R902.2 SPI1.2 U401.P$7 U502.1 U504.1 U601.P$7 U701.8 U801.2 U801.14 U801.24 U801.34 U801.42 U801.44 U901.14 U901.28 U901.42 VDD800.X
VIN: C101.+ D101.C IC105.16 JANALOG.8 R130.1
VUSB: C803.1 D801.4 L801.2 Q101.D1 Q101.D1' R125.2 U801.7
WIFI/BLE1:N$1: C303.1 Q301.6 R301.1 U301.19
WIFI/BLE1:N$2: R303.1 U301.35
WIFI/BLE1:N$3: R304.1 U301.31
WIFI/BLE1:N$4: DL301.2 U301.16
WIFI/BLE1:N$5: DL301.1 U301.17
WIFI/BLE1:N$6: DL301.3 U301.18
WIFI/BLE1:N$7: DL301.5 R305.2
WIFI/BLE1:N$8: DL301.6 R306.2
WIFI/BLE1:N$9: DL301.4 R307.2
WIFI/BLE1:N$10: R309.2 U301.24
WIFI/BLE1:N$11: Q301.5 R308.1 R309.1 R310.1
WIFI/BLE1:N$12: R310.2 U301.21